# EAGLE board circuit (EAGLE 7.5.0)
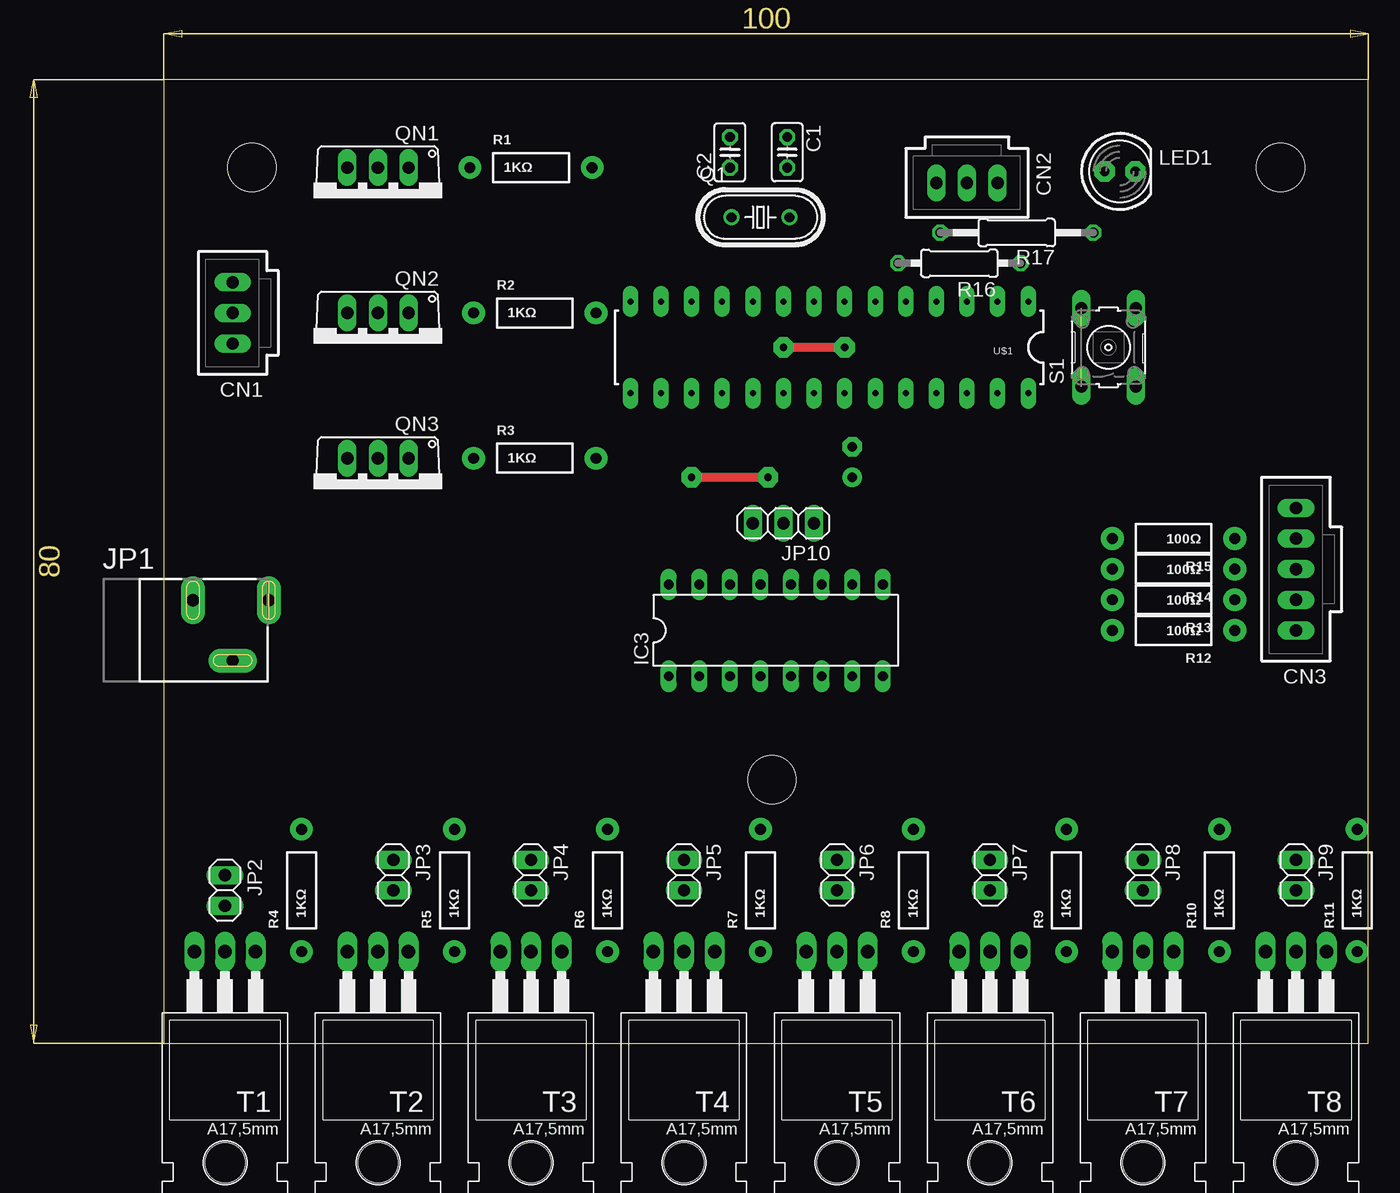
[diagram p0: board, top side]
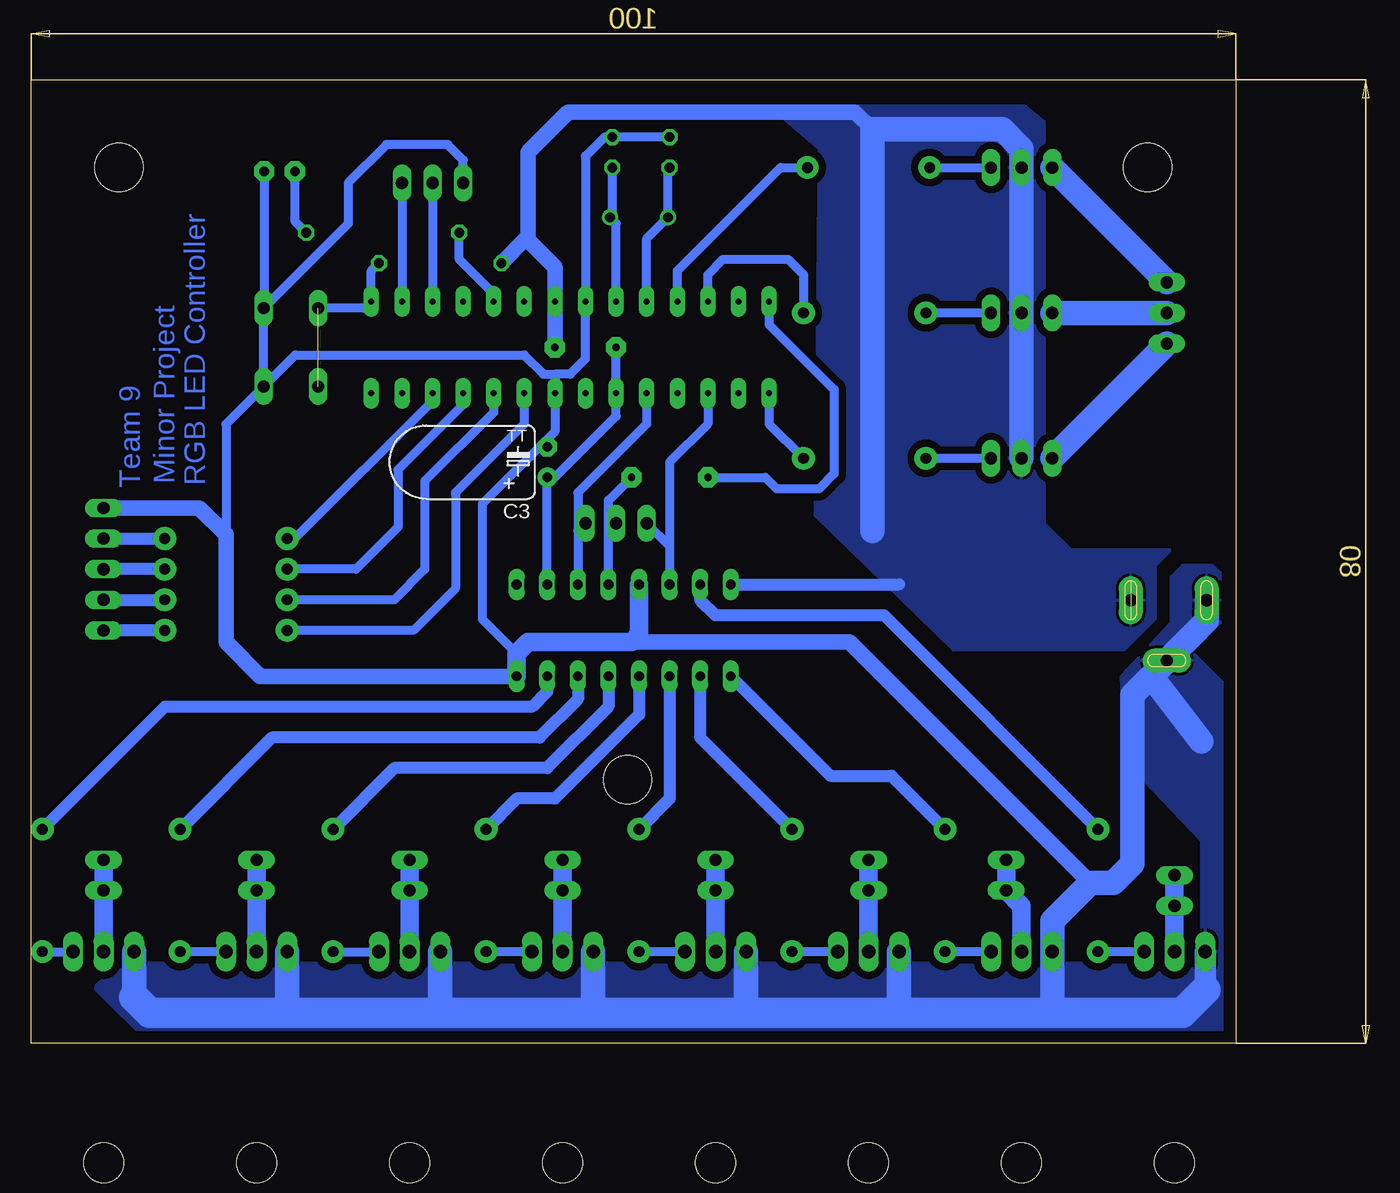
[diagram p1: board, bottom side, seen from below]

Size 100 x 80 mm. Coordinates in mm from the lower left corner, seen from the top.
Outline: 0,0 100,0 100,80 0,80 0,0
Copper layers (1*16): Top 0.035mm / dielectric 1.5mm / Bottom 0.035mm
Design rules "default": minimum track width 10mil, minimum drill 24mil, track to track 8mil, track to pad 8mil, pad to pad 8mil, via to via 8mil, smd to smd 8mil, copper to edge 40mil, drill to drill 8mil, minimum pad ring 10mil, minimum via ring 8mil, stop-mask expansion 4mil, vias tented up to drill 0mil, thermal gap 10mil
Net classes: 0 default: width 1.016 mm, clearance 0.61 mm; 1 Power_VHC: width 1.778 mm, clearance 1.016 mm; 2 Gnd_VHC: width 2.032 mm, clearance 1.016 mm
Holes 4 mm at 92.71,72.71 7.3,72.71 50.48,21.91

## Footprints (pad centres in the part's own frame; a part is rotated, then mirrored left to right if it is on the bottom)
C025-025X050 = drill 0.813 octagon: 1 -1.27,0; 2 1.27,0
TT2D6L = drill 0.813 pad 1.6: + -1.27,0 | drill 0.813 pad 1.6 octagon: - 1.27,0
70543-03 = drill 1.016 long: 1 -2.54,0; 2 0,0; 3 2.54,0
70543-05 = drill 1.016 long: 1 -5.08,0; 2 -2.54,0; 3 0,0; 4 2.54,0; 5 5.08,0
DIL16 = drill 0.813 long: 1 -8.89,-3.81; 2 -6.35,-3.81; 3 -3.81,-3.81; 4 -1.27,-3.81; 5 1.27,-3.81; 6 3.81,-3.81; 7 6.35,-3.81; 8 8.89,-3.81; 9 8.89,3.81; 10 6.35,3.81; 11 3.81,3.81; 12 1.27,3.81; 13 -1.27,3.81; 14 -3.81,3.81; 15 -6.35,3.81; 16 -8.89,3.81
POWER_JACK_SLOT = drill 1 pad 2 long: GND@1 2.58,7.5; GND@2 7.58,10.8; PWR 2.58,13.8
1X02 = drill 1.016 long: 1 -1.27,0; 2 1.27,0
1X03 = drill 1.016 long: 1 -2.54,0; 2 0,0; 3 2.54,0
LED5MM = drill 0.813 pad 1.676 octagon: A -1.27,0; K 1.27,0
HC49U-V = drill 0.813: 1 -2.413,0; 2 2.413,0
TO220AV = drill 1.016 long: B -2.54,-2.54; C 0,-2.54; E 2.54,-2.54
AXIAL-0.4 = drill 0.9 pad 1.88: P$1 -5.08,0; P$2 5.08,0
0207/10 = drill 0.813 octagon: 1 -5.08,0; 2 5.08,0
0207/12 = drill 0.813 octagon: 1 -6.35,0; 2 6.35,0
B3F-10XX = drill 1.016 long: 1 -3.251,2.261; 2 3.251,2.261; 3 -3.251,-2.261; 4 3.251,-2.261
TO220 = drill 1.118 long: 1 -2.54,-6.35; 2 0,-6.35; 3 2.54,-6.35 | hole 3.302: 0,11.176
ATMEGA328_CUSTOMPAD = drill 0.5 pad 1.27 long: 1 -16.51,-3.81; 2 -13.97,-3.81; 3 -11.43,-3.81; 4 -8.89,-3.81; 5 -6.35,-3.81; 6 -3.81,-3.81; 7 -1.27,-3.81; 8 1.27,-3.81; 9 3.81,-3.81; 10 6.35,-3.81; 11 8.89,-3.81; 12 11.43,-3.81; 13 13.97,-3.81; 14 16.51,-3.81; 15 16.51,3.81; 16 13.97,3.81; 17 11.43,3.81; 18 8.89,3.81; 19 6.35,3.81; 20 3.81,3.81; 21 1.27,3.81; 22 -1.27,3.81; 23 -3.81,3.81; 24 -6.35,3.81; 25 -8.89,3.81; 26 -11.43,3.81; 27 -13.97,3.81; 28 -16.51,3.81

## Placement (x,y rotation side)
C1  22pF  [C025-025X050]  51.75,73.98 270 top
C2  22pF  [C025-025X050]  46.99,73.98 90 top
C3  [TT2D6L]  57.15,48.26 90 bottom
CN1  [70543-03]  5.71,60.64 90 top
CN2  [70543-03]  66.67,71.44 180 top
CN3  [70543-05]  93.98,39.37 90 top
IC3  74HC595N  [DIL16]  50.8,34.29 0 top
JP1  POWER_JACKSLT  [POWER_JACK_SLOT]  -5.08,39.37 270 top
JP2  [1X02]  5.08,12.7 270 top
JP3  [1X02]  19.05,13.97 270 top
JP4  [1X02]  30.48,13.97 270 top
JP5  [1X02]  43.18,13.97 270 top
JP6  [1X02]  55.88,13.97 270 top
JP7  [1X02]  68.58,13.97 270 top
JP8  [1X02]  81.28,13.97 270 top
JP9  [1X02]  93.98,13.97 270 top
JP10  [1X03]  51.44,43.18 180 top
LED1  [LED5MM]  79.38,72.39 0 top
Q1  16MHz  [HC49U-V]  49.53,68.58 0 top
QN1  TIP127  [TO220AV]  17.78,70.17 180 top
QN2  TIP127  [TO220AV]  17.78,58.1 180 top
QN3  TIP127  [TO220AV]  17.78,46.04 180 top
R1  1KΩ  [AXIAL-0.4]  30.48,72.71 0 top
R2  1KΩ  [AXIAL-0.4]  30.8,60.64 0 top
R3  1KΩ  [AXIAL-0.4]  30.8,48.58 0 top
R4  1KΩ  [AXIAL-0.4]  11.43,12.7 90 top
R5  1KΩ  [AXIAL-0.4]  24.13,12.7 90 top
R6  1KΩ  [AXIAL-0.4]  36.83,12.7 90 top
R7  1KΩ  [AXIAL-0.4]  49.53,12.7 90 top
R8  1KΩ  [AXIAL-0.4]  62.23,12.7 90 top
R9  1KΩ  [AXIAL-0.4]  74.93,12.7 90 top
R10  1KΩ  [AXIAL-0.4]  87.63,12.7 90 top
R11  1KΩ  [AXIAL-0.4]  99.06,12.7 90 top
R12  100Ω  [AXIAL-0.4]  83.82,34.29 180 top
R13  100Ω  [AXIAL-0.4]  83.82,36.83 180 top
R14  100Ω  [AXIAL-0.4]  83.82,39.37 180 top
R15  100Ω  [AXIAL-0.4]  83.82,41.91 180 top
R16  10KΩ  [0207/10]  66.04,64.77 180 top
R17  470Ω  [0207/12]  70.8,67.31 180 top
S1  [B3F-10XX]  78.42,57.78 90 top
T1  TIP122  [TO220]  5.08,1.27 180 top
T2  TIP122  [TO220]  17.78,1.27 180 top
T3  TIP122  [TO220]  30.48,1.27 180 top
T4  TIP122  [TO220]  43.18,1.27 180 top
T5  TIP122  [TO220]  55.88,1.27 180 top
T6  TIP122  [TO220]  68.58,1.27 180 top
T7  TIP122  [TO220]  81.28,1.27 180 top
T8  TIP122  [TO220]  93.98,1.27 180 top
U$1  ATMEGA328P_DIP  [ATMEGA328_CUSTOMPAD]  55.24,57.78 180 top

## Library data of the parts
C1 C2 R16 R17 = rcl
C3 = resistor
CN1-CN3 = con-hdrs40
IC3 = 74xx-eu
JP1 = SparkFun-Connectors; PROD_ID: PRT-00119
JP2-JP10 = pinhead
LED1 = adafruit
Q1 = crystal; OC_FARNELL: 1666969; OC_NEWARK: unknown
QN1-QN3 = PAsystem
R1-R15 = SparkFun-Resistors
S1 = switch-omron; MPN: B3F-1000; OC_FARNELL: 176432; OC_NEWARK: 36M3542
T1-T8 = transistor
U$1 = prajankya

## Nets
BLUE_PWM: R3.P$2 U$1.15
GND: C1.1 C2.2 C3.- CN2.3 CN3.5 IC3.8 IC3.13 JP1.GND@1 JP1.GND@2 LED1.K S1.3 S1.4 T1.3 T2.3 T3.3 T4.3 T5.3 T6.3 T7.3 T8.3 U$1.8 U$1.22
GREEN_PWM: R2.P$2 U$1.12
N1: JP2.1 JP2.2 T1.2
N2: JP3.1 JP3.2 T2.2
N3: JP4.1 JP4.2 T3.2
N4: JP5.1 JP5.2 T4.2
N5: JP6.1 JP6.2 T5.2
N6: JP7.1 JP7.2 T6.2
N7: JP8.1 JP8.2 T7.2
N8: JP9.1 JP9.2 T8.2
N$1: CN1.3 QN1.E
N$2: CN1.2 QN2.E
N$3: CN1.1 QN3.E
N$4: QN1.B R1.P$1
N$5: QN2.B R2.P$1
N$6: QN3.B R3.P$1
N$7: R4.P$1 T1.1
N$8: R5.P$1 T2.1
N$9: R12.P$2 U$1.23
N$10: IC3.15 R4.P$2
N$11: R13.P$2 U$1.24
N$12: IC3.1 R5.P$2
N$13: R6.P$1 T3.1
N$14: R14.P$2 U$1.25
N$15: IC3.2 R6.P$2
N$16: R7.P$1 T4.1
N$17: R15.P$2 U$1.26
N$18: IC3.3 R7.P$2
N$19: R8.P$1 T5.1
N$20: CN2.1 U$1.2
N$21: IC3.4 R8.P$2
N$22: R9.P$1 T6.1
N$23: CN2.2 U$1.3
N$24: IC3.5 R9.P$2
N$25: R10.P$1 T7.1
N$26: R17.2 U$1.5
N$27: IC3.6 R10.P$2
N$28: R11.P$1 T8.1
N$29: LED1.A R17.1
N$30: IC3.7 R11.P$2
N$31: IC3.11 JP10.1 U$1.19
N$32: IC3.12 JP10.2 U$1.14
N$37: C2.1 Q1.1 U$1.10
N$38: C1.2 Q1.2 U$1.9
N$41: CN3.1 R12.P$1
N$42: CN3.2 R13.P$1
N$43: CN3.3 R14.P$1
N$44: CN3.4 R15.P$1
N$45: IC3.14 JP10.3 U$1.17
N$48: R16.1 S1.1 S1.2 U$1.1
RED_PWM: R1.P$2 U$1.11
VCC: C3.+ IC3.10 IC3.16 JP1.PWR QN1.C QN2.C QN3.C R16.2 U$1.7 U$1.20

## Tracks (layer width: path | path; a pad name or v marks a point on that pad's centre or on a via)
BLUE_PWM
  Bottom 0.762: U$1.15 38.73,51.44 R3.P$2
GND
  Bottom 0.254: C3.- 57.15,50.16 56.83,50.48
  Bottom 0.762: U$1.22 56.52,50.8 56.83,50.48 62.55,44.77 62.55,35.24 59.69,32.38 | U$1.22 56.52,54.93 | 56.52,55.56 55.24,55.56 53.98,56.83 U$1.8 53.98,73.66 52.39,75.25 C1.1 C2.2 | 56.52,55.56 U$1.22 | 56.52,55.56 57.47,55.56 59.05,57.15 78.07,57.15 80.61,54.61 80.64,54.61 80.68,54.65 S1.4 | S1.3 83.82,51.4 83.82,41.59 | CN2.3 64.14,73.34 65.41,74.61 70.48,74.61 73.66,71.44 73.66,68.06 S1.4 | LED1.K 80.64,61.07 S1.4
  Bottom 1.27: CN3.5 86.04,44.45 83.82,42.23 83.82,41.59 83.82,33.34 80.96,30.48 IC3.8 | 50.16,33.34 32.07,33.34 12.06,13.34
  Bottom 1.524: IC3.13 49.53,33.97 50.16,33.34 58.74,33.34 59.69,32.38 IC3.8
  Bottom 1.778: 15.24,2.86 14.92,2.54 | T1.3 2.54,4.45
  Bottom 2.032: T3.3 27.94,2.54 | T4.3 40.64,2.54 | T5.3 53.34,3.17 52.7,2.54 | T6.3 66.04,2.54 | T7.3 78.74,2.54 | T8.3 91.44,3.81 | JP1.GND@2 8.57,28.94 8.57,14.92 10.16,13.34 12.06,13.34 15.24,10.16 T2.3 15.24,3.17 15.88,2.54 | JP1.GND@1 2.42,35.09 JP1.GND@2 | 2.86,25.08 6.99,30.48 5.72,31.75 JP1.GND@2
  Bottom 2.54: 91.44,3.81 90.17,2.54 78.74,2.54 66.04,2.54 52.7,2.54 40.64,2.54 27.94,2.54 15.88,2.54 14.92,2.54 4.45,2.54 2.54,4.45
  pour Bottom: 2.86,16.83 2.86,7.62 3.81,6.67 92.08,6.67 93.03,5.71 93.66,5.71 94.61,4.76 94.61,4.45 90.17,0 0,0 0,28.89 3.81,32.7 3.49,32.7 1.27,34.92 1.27,39.05 1.91,39.69 4.45,39.69 5.4,38.73 5.4,34.92 9.53,30.48 9.21,23.5
GREEN_PWM
  Bottom 0.762: U$1.12 43.81,63.82 42.55,65.09 37.15,65.09 35.88,63.82 R2.P$2
N1
  Bottom 1.524: T1.2 JP2.2 JP2.1
N2
  Bottom 1.524: T2.2 17.78,11.43 JP3.2 JP3.1
N3
  Bottom 1.524: T3.2 JP4.2 JP4.1
N4
  Bottom 1.524: T4.2 JP5.2 JP5.1
N5
  Bottom 1.524: T5.2 JP6.2 JP6.1
N6
  Bottom 1.524: T6.2 JP7.2 JP7.1
N7
  Bottom 1.524: T7.2 JP8.2 JP8.1
N8
  Bottom 1.524: T8.2 JP9.2 JP9.1
N$1
  Bottom 2.032: QN1.E CN1.3
N$2
  Bottom 2.032: CN1.2 QN2.E
N$3
  Bottom 2.032: CN1.1 QN3.E
N$4
  Bottom 0.762: R1.P$1 QN1.B
N$5
  Bottom 0.762: QN2.B R2.P$1
N$6
  Bottom 0.762: R3.P$1 QN3.B
N$7
  Bottom 0.762: T1.1 R4.P$1
N$8
  Bottom 0.762: T2.1 R5.P$1
N$9
  Bottom 0.762: U$1.23 59.05,51.44 64.77,45.72 64.77,37.78 68.26,34.29 R12.P$2
N$10
  Bottom 1.016: IC3.15 44.45,36.83 43.18,35.56 29.21,35.56 R4.P$2
N$11
  Bottom 0.762: U$1.24 61.59,52.39 67.31,46.67 67.31,39.37 69.85,36.83 R13.P$2
N$12
  Bottom 1.016: IC3.1 33.66,22.23 28.57,22.23 R5.P$2
N$13
  Bottom 0.762: T3.1 R6.P$1
N$14
  Bottom 0.762: U$1.25 64.14,53.02 69.53,47.62 69.53,42.86 73.03,39.37 R14.P$2
N$15
  Bottom 1.016: IC3.2 44.45,25.4 R6.P$2
N$16
  Bottom 0.762: T4.1 R7.P$1
N$17
  Bottom 0.762: R15.P$2 78.11,41.91 66.67,53.34 U$1.26
N$18
  Bottom 1.016: IC3.3 46.99,20.32 R7.P$2
N$19
  Bottom 0.762: T5.1 R8.P$1
N$20
  Bottom 0.762: CN2.1 U$1.2
N$21
  Bottom 1.016: IC3.4 49.53,27.3 56.52,20.32 59.69,20.32 R8.P$2
N$22
  Bottom 0.762: R9.P$1 T6.1
N$23
  Bottom 0.762: CN2.2 U$1.3
N$24
  Bottom 1.016: IC3.5 52.07,27.94 57.15,22.86 69.85,22.86 R9.P$2
N$25
  Bottom 0.762: T7.1 R10.P$1
N$26
  Bottom 0.762: U$1.5 61.59,62.23 64.45,65.09 R17.2
N$27
  Bottom 1.016: IC3.6 54.61,28.57 57.78,25.4 80.01,25.4 R10.P$2
N$28
  Bottom 0.762: R11.P$1 T8.1
N$29
  Bottom 0.762: LED1.A 78.11,68.26 R17.1
N$30
  Bottom 1.016: IC3.7 57.15,29.21 58.42,27.94 88.9,27.94 R11.P$2
N$31
  Bottom 0.762: JP10.1 54.61,42.55 | 54.61,42.55 IC3.11 | U$1.19 48.9,51.44 54.61,45.72 54.61,42.55
N$32  (via drill 0.6 pad 1.68)
  Top 0.762: v50.16,46.99 v43.81,46.99
  Bottom 0.762: IC3.12 52.07,43.18 | 52.07,43.18 52.07,45.09 v50.16,46.99 | JP10.2 52.07,43.18 | U$1.14 38.73,59.69 33.34,54.29 33.34,47.31 34.61,46.04 38.1,46.04 39.05,46.99 v43.81,46.99
N$37
  Bottom 0.762: U$1.10 48.9,66.8 Q1.1 47.12,72.26 C2.1
N$38
  Bottom 0.762: U$1.9 51.44,68.07 51.53,68.17 51.75,68.39 | 51.75,68.39 Q1.2 | C1.2 51.75,68.39
N$41
  Bottom 1.016: R12.P$1 CN3.1
N$42
  Bottom 1.016: CN3.2 R13.P$1
N$43
  Bottom 1.016: R14.P$1 CN3.3
N$44
  Bottom 1.016: CN3.4 R15.P$1
N$45
  Bottom 0.762: JP10.3 46.99,41.27 | 46.99,41.27 46.99,40.64 IC3.14 | U$1.17 43.81,51.44 46.99,48.26 46.99,41.27
N$48  (1 unrouted)
  Bottom 0.762: R16.1 71.75,64.14 U$1.1 72.31,61.04 S1.2
RED_PWM
  Bottom 0.762: U$1.11 46.35,64.14 37.78,72.71 R1.P$2
VCC  (via drill 0.6 pad 1.68)
  Top 0.762: v51.44,57.78 v56.52,57.78
  Bottom 0.254: C3.+ 56.83,46.67
  Bottom 0.762: IC3.10 57.15,46.35 56.83,46.67 51.44,52.07 U$1.20 v51.44,57.78
  Bottom 1.016: IC3.16 27.94,38.1
  Bottom 1.27: 30.16,75.88 31.59,77.31 55.4,77.31 58.74,73.98 58.74,66.99 58.9,66.83 | 58.9,66.83 R16.2 | 58.9,66.83 56.52,64.45 U$1.7 v56.52,57.78
  Bottom 1.778: 8.76,36.83 JP1.PWR
  Bottom 2.032: QN1.C QN2.C QN3.C | 30.16,42.55 30.16,75.88 19.37,75.88 17.78,74.3 17.78,73.03
  pour Bottom: 5.4,40.96 13.65,40.96 15.88,43.18 15.88,76.52 17.46,77.79 38.73,77.79 34.61,74.3 34.92,43.81 23.5,32.7 9.21,32.7 6.67,35.24 6.67,39.69

## Text on the board
Bottom: RGB LED Controller | Minor Project | Team 9